# EAGLE board combined (EAGLE 5.11)
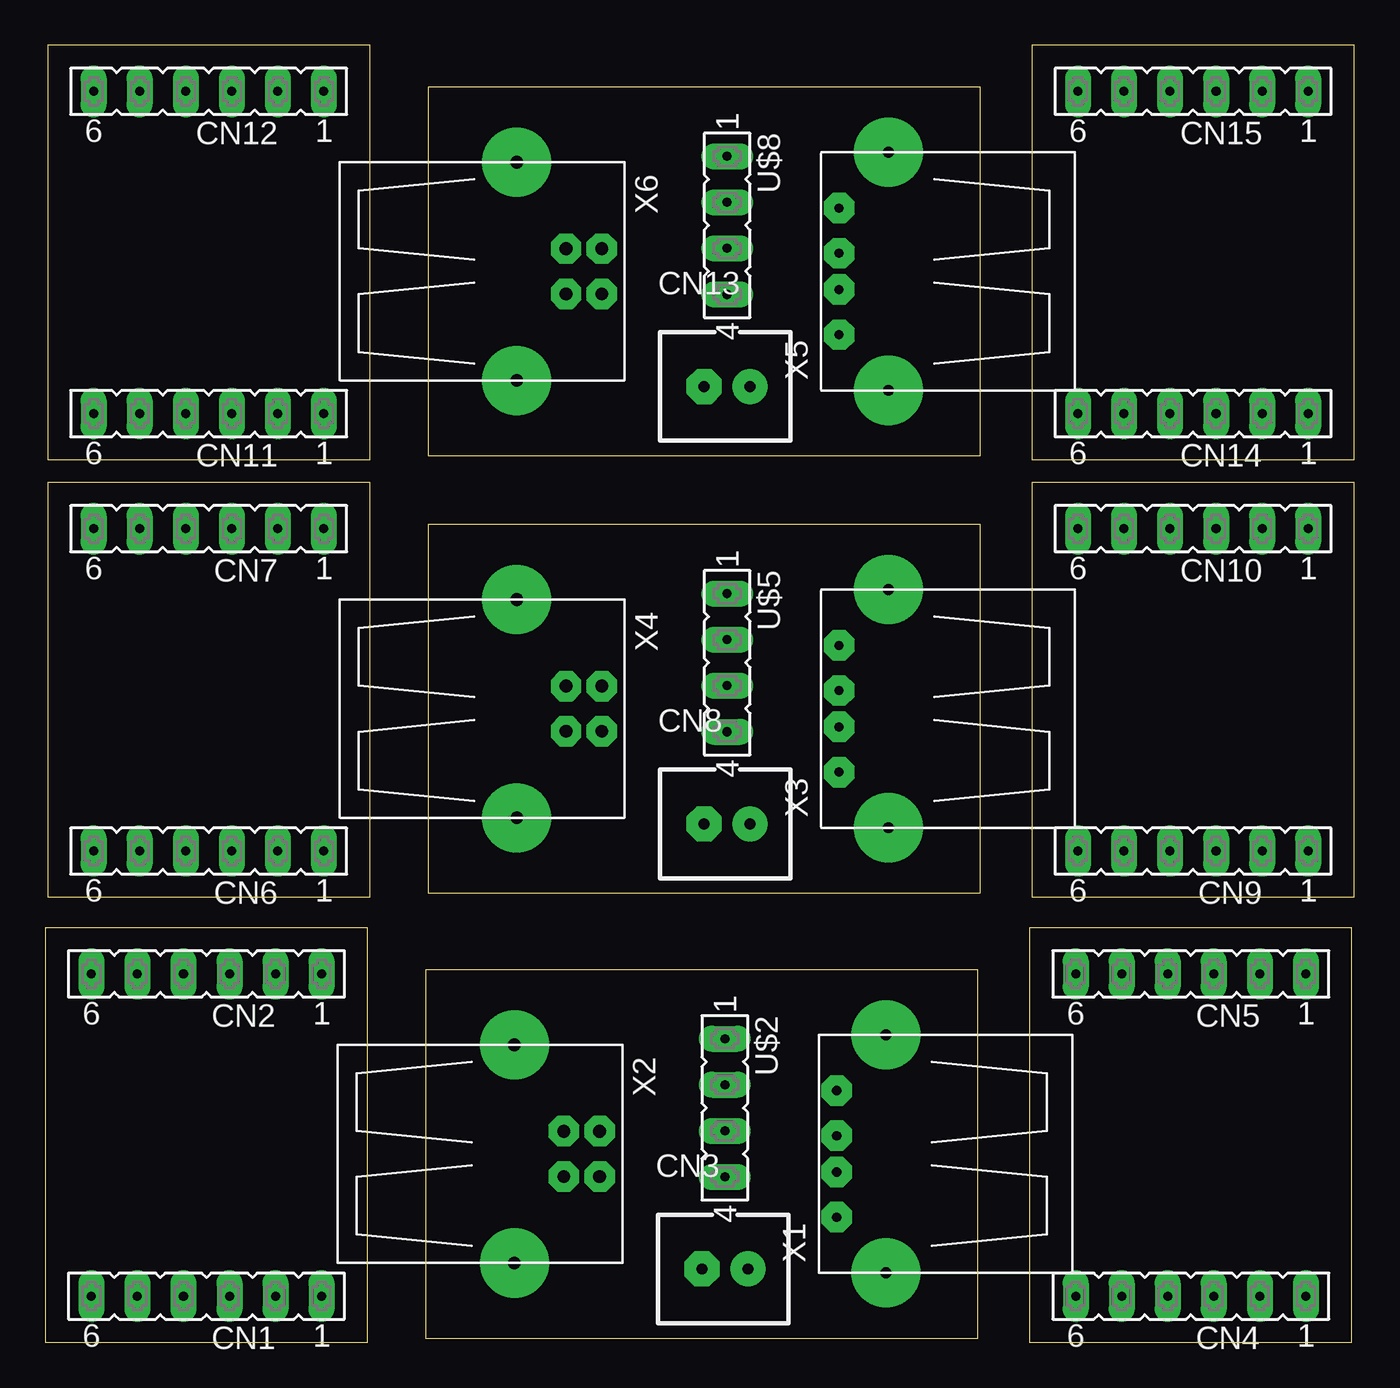
[diagram p0: board, top side]
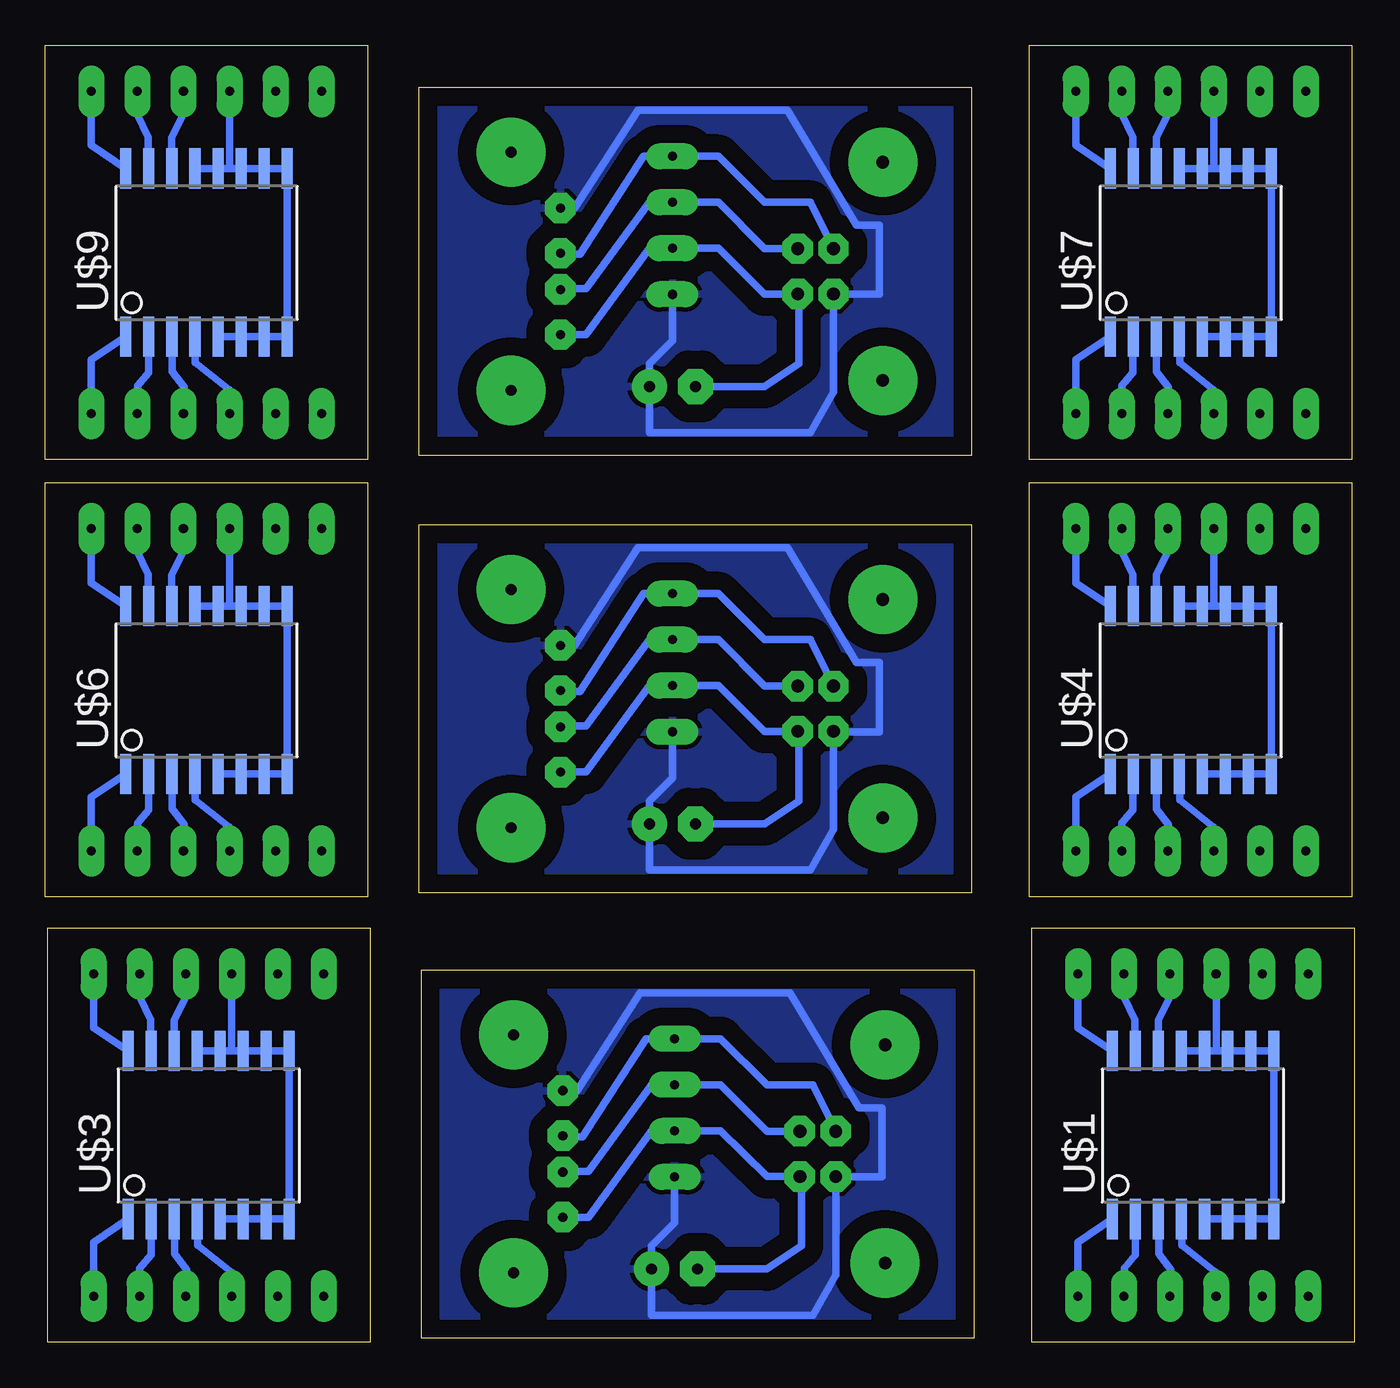
[diagram p1: board, bottom side, seen from below]

Size 72.21 x 71.55 mm. Coordinates in mm from the lower left corner, seen from the top.
Outline: 0,0 17.78,0 17.78,22.86 0,22.86 0,0
Outline: 20.98,0.23 51.46,0.23 51.46,20.55 20.98,20.55 20.98,0.23
Outline: 54.3,0 72.08,0 72.08,22.86 54.3,22.86 54.3,0
Outline: 0.13,24.56 17.91,24.56 17.91,47.42 0.13,47.42 0.13,24.56
Outline: 21.11,24.79 51.59,24.79 51.59,45.11 21.11,45.11 21.11,24.79
Outline: 54.43,24.56 72.21,24.56 72.21,47.42 54.43,47.42 54.43,24.56
Outline: 0.13,48.69 17.91,48.69 17.91,71.55 0.13,71.55 0.13,48.69
Outline: 21.11,48.92 51.59,48.92 51.59,69.24 21.11,69.24 21.11,48.92
Outline: 54.43,48.69 72.21,48.69 72.21,71.55 54.43,71.55 54.43,48.69
Copper layers (1*16): Top 0.035mm / dielectric 1.5mm / Bottom 0.035mm
Design rules "default": minimum track width 10mil, minimum drill 24mil, track to track 8mil, track to pad 8mil, pad to pad 8mil, via to via 8mil, smd to smd 8mil, copper to edge 40mil, drill to drill 8mil, minimum pad ring 10mil, minimum via ring 8mil, stop-mask expansion 4mil, vias tented up to drill 0mil, thermal gap 10mil

## Footprints (pad centres in the part's own frame; a part is rotated, then mirrored left to right if it is on the bottom)
CON-S6-1 = drill 0.5 pad 1.422 long: 1 -5.08,0; 2 -2.54,0; 3 0,0; 4 2.54,0; 5 5.08,0; 6 7.62,0
CON_HRS_DIP_2 = drill 0.6 pad 1.93 octagon: 1 -1.27,0 | drill 0.6 pad 1.93 round: 2 1.27,0
SO16L$ = smd 0.61 x 2.21: 1 -4.445,-4.636; 2 -3.175,-4.636; 3 -1.905,-4.636; 4 -0.635,-4.636; 5 0.635,-4.636; 6 1.905,-4.636; 7 3.175,-4.636; 8 4.445,-4.636; 9 4.445,4.636; 10 3.175,4.636; 11 1.905,4.636; 12 0.635,4.636; 13 -0.635,4.636; 14 -1.905,4.636; 15 -3.175,4.636; 16 -4.445,4.636
CON-S4-1 = drill 0.5 pad 1.422 long: 1 -3.81,0; 2 -1.27,0; 3 1.27,0; 4 3.81,0
USB-A-H = drill 0.5 pad 1.676 octagon: D+ 2.718,-1.003; D- 2.718,1.003; GND 2.718,-3.493; VBUS 2.718,3.493 | drill 0.6 pad 3.81 round: P$5 0,-6.566; P$6 0,6.566
USB-B-H = drill 0.7 pad 1.676 octagon: D+ 0,1.25; D- 1.981,1.25; GND 0,-1.25; VBUS 1.981,-1.25 | drill 0.7 pad 3.81 round: P$1 -2.718,-6.02; P$2 -2.718,6.02

## Placement (x,y rotation side)
CN1  CON-S6-1  [CON-S6-1]  10.16,2.54 180 top
CN2  CON-S6-1  [CON-S6-1]  10.16,20.32 180 top
CN3  [CON_HRS_DIP_2]  37.49,4.04 0 top
CN4  CON-S6-1  [CON-S6-1]  64.47,2.54 180 top
CN5  CON-S6-1  [CON-S6-1]  64.47,20.32 180 top
CN6  CON-S6-1  [CON-S6-1]  10.29,27.1 180 top
CN7  CON-S6-1  [CON-S6-1]  10.29,44.88 180 top
CN8  [CON_HRS_DIP_2]  37.62,28.6 0 top
CN9  CON-S6-1  [CON-S6-1]  64.59,27.1 180 top
CN10  CON-S6-1  [CON-S6-1]  64.59,44.88 180 top
CN11  CON-S6-1  [CON-S6-1]  10.29,51.23 180 top
CN12  CON-S6-1  [CON-S6-1]  10.29,69.01 180 top
CN13  [CON_HRS_DIP_2]  37.62,52.73 0 top
CN14  CON-S6-1  [CON-S6-1]  64.59,51.23 180 top
CN15  CON-S6-1  [CON-S6-1]  64.59,69.01 180 top
U$1  MAX-DS3231S  [SO16L$]  8.89,11.43 0 bottom
U$2  CON-S4-1  [CON-S4-1]  37.49,12.93 270 top
U$3  MAX-DS3231S  [SO16L$]  63.2,11.43 0 bottom
U$4  MAX-DS3231S  [SO16L$]  9.02,35.99 0 bottom
U$5  CON-S4-1  [CON-S4-1]  37.62,37.49 270 top
U$6  MAX-DS3231S  [SO16L$]  63.32,35.99 0 bottom
U$7  MAX-DS3231S  [SO16L$]  9.02,60.12 0 bottom
U$8  CON-S4-1  [CON-S4-1]  37.62,61.62 270 top
U$9  MAX-DS3231S  [SO16L$]  63.32,60.12 0 bottom
X1  [USB-A-H]  46.38,10.39 180 top
X2  [USB-B-H]  28.6,10.39 0 top
X3  [USB-A-H]  46.51,34.95 180 top
X4  [USB-B-H]  28.73,34.95 0 top
X5  [USB-A-H]  46.51,59.08 180 top
X6  [USB-B-H]  28.73,59.08 0 top

## Library data of the parts
CN1-CN15 = MyLib
U$1 U$3 U$4 U$6 U$7 U$9 = bant2
U$2 U$5 U$8 = bant
X1-X6 = con-usb

## Nets
GND: CN2.4 U$1.5 U$1.6 U$1.7 U$1.8 U$1.9 U$1.10 U$1.11 U$1.12 U$1.13
GND1: CN3.2 U$2.4 X1.GND X2.GND
GND2: CN5.4 U$3.5 U$3.6 U$3.7 U$3.8 U$3.9 U$3.10 U$3.11 U$3.12 U$3.13
GND3: CN7.4 U$4.5 U$4.6 U$4.7 U$4.8 U$4.9 U$4.10 U$4.11 U$4.12 U$4.13
GND4: CN8.2 U$5.4 X3.GND X4.GND
GND5: CN10.4 U$6.5 U$6.6 U$6.7 U$6.8 U$6.9 U$6.10 U$6.11 U$6.12 U$6.13
GND6: CN12.4 U$7.5 U$7.6 U$7.7 U$7.8 U$7.9 U$7.10 U$7.11 U$7.12 U$7.13
GND7: CN13.2 U$8.4 X5.GND X6.GND
GND8: CN15.4 U$9.5 U$9.6 U$9.7 U$9.8 U$9.9 U$9.10 U$9.11 U$9.12 U$9.13
N$1: CN1.1 U$1.1
N$2: CN1.2 U$1.2
N$3: CN1.3 U$1.3
N$4: CN1.4 U$1.4
N$5: U$2.1 X1.D+ X2.D+
N$6: U$2.2 X1.D- X2.D-
N$7: CN2.1 U$1.16
N$8: CN2.2 U$1.15
N$9: CN2.3 U$1.14
N$10: CN4.1 U$3.1
N$11: CN4.2 U$3.2
N$12: CN4.3 U$3.3
N$13: CN4.4 U$3.4
N$14: CN5.1 U$3.16
N$15: CN5.2 U$3.15
N$16: CN5.3 U$3.14
N$17: CN6.1 U$4.1
N$18: CN6.2 U$4.2
N$19: CN6.3 U$4.3
N$20: CN6.4 U$4.4
N$21: CN7.1 U$4.16
N$22: CN7.2 U$4.15
N$23: CN7.3 U$4.14
N$24: U$5.1 X3.D+ X4.D+
N$25: U$5.2 X3.D- X4.D-
N$26: CN9.1 U$6.1
N$27: CN9.2 U$6.2
N$28: CN9.3 U$6.3
N$29: CN9.4 U$6.4
N$30: CN10.1 U$6.16
N$31: CN10.2 U$6.15
N$32: CN10.3 U$6.14
N$33: CN11.1 U$7.1
N$34: CN11.2 U$7.2
N$35: CN11.3 U$7.3
N$36: CN11.4 U$7.4
N$37: CN12.1 U$7.16
N$38: CN12.2 U$7.15
N$39: CN12.3 U$7.14
N$40: U$8.1 X5.D+ X6.D+
N$41: U$8.2 X5.D- X6.D-
N$42: CN14.1 U$9.1
N$43: CN14.2 U$9.2
N$44: CN14.3 U$9.3
N$45: CN14.4 U$9.4
N$46: CN15.1 U$9.16
N$47: CN15.2 U$9.15
N$48: CN15.3 U$9.14
VCC: CN3.1 U$2.3 X1.VBUS X2.VBUS
VCC1: CN8.1 U$5.3 X3.VBUS X4.VBUS
VCC2: CN13.1 U$8.3 X5.VBUS X6.VBUS

## Tracks (layer width: path | path; a pad name or v marks a point on that pad's centre or on a via)
GND
  Bottom 0.406: U$1.13 U$1.12 7.62,16.07 | 7.62,16.07 U$1.11 U$1.10 U$1.9 U$1.8 U$1.7 U$1.6 U$1.5 | 7.62,16.07 CN2.4
GND1
  Bottom 0.406: U$2.4 37.49,6.58 38.76,5.31 CN3.2 38.76,1.5 29.87,1.5 28.6,3.72 X2.GND 28.6,9.12 26.06,9.12 26.06,12.93 27.33,12.93 31.14,19.28 39.4,19.28 42.89,13.88 X1.GND
  pour Bottom (isolate 1.016): 20.98,20.55 20.98,0.23 51.46,0.23 51.46,20.55
GND2
  Bottom 0.406: U$3.13 U$3.12 61.92,16.07 | 61.92,16.07 U$3.11 U$3.10 U$3.9 U$3.8 U$3.7 U$3.6 U$3.5 | 61.92,16.07 CN5.4
GND3
  Bottom 0.406: U$4.13 U$4.12 7.75,40.63 | 7.75,40.63 U$4.11 U$4.10 U$4.9 U$4.8 U$4.7 U$4.6 U$4.5 | 7.75,40.63 CN7.4
GND4
  Bottom 0.406: U$5.4 37.62,31.14 38.89,29.87 CN8.2 38.89,26.06 30,26.06 28.73,28.28 X4.GND 28.73,33.68 26.19,33.68 26.19,37.49 27.46,37.49 31.27,43.84 39.52,43.84 43.02,38.44 X3.GND
  pour Bottom (isolate 1.016): 21.11,45.11 21.11,24.79 51.59,24.79 51.59,45.11
GND5
  Bottom 0.406: U$6.13 U$6.12 62.05,40.63 | 62.05,40.63 U$6.11 U$6.10 U$6.9 U$6.8 U$6.7 U$6.6 U$6.5 | 62.05,40.63 CN10.4
GND6
  Bottom 0.406: U$7.13 U$7.12 7.75,64.76 | 7.75,64.76 U$7.11 U$7.10 U$7.9 U$7.8 U$7.7 U$7.6 U$7.5 | 7.75,64.76 CN12.4
GND7
  Bottom 0.406: U$8.4 37.62,55.27 38.89,54 CN13.2 38.89,50.19 30,50.19 28.73,52.41 X6.GND 28.73,57.81 26.19,57.81 26.19,61.62 27.46,61.62 31.27,67.97 39.52,67.97 43.02,62.57 X5.GND
  pour Bottom (isolate 1.016): 21.11,69.24 21.11,48.92 51.59,48.92 51.59,69.24
GND8
  Bottom 0.406: U$9.13 U$9.12 62.05,64.76 | 62.05,64.76 U$9.11 U$9.10 U$9.9 U$9.8 U$9.7 U$9.6 U$9.5 | 62.05,64.76 CN15.4
N$1
  Bottom 0.406: U$1.1 15.24,5.52 CN1.1
N$2
  Bottom 0.406: U$1.2 12.08,4.81 12.69,4.08 CN1.2
N$3
  Bottom 0.406: U$1.3 10.78,4.87 10.12,4.01 CN1.3
N$4
  Bottom 0.406: U$1.4 9.5,5.35 7.63,3.85 CN1.4
N$5
  Bottom 0.406: X1.D+ 43.34,11.34 42.57,11.34 39.08,16.74 U$2.1 34.95,16.74 32.41,14.2 29.87,14.2 X2.D+
N$6
  Bottom 0.406: X2.D- 32.41,11.64 34.95,14.2 U$2.2 38.76,14.2 42.25,9.44 43.66,9.44 X1.D-
N$7
  Bottom 0.406: U$1.16 15.24,17.34 CN2.1
N$8
  Bottom 0.406: U$1.15 12.09,17.79 12.7,19.05 CN2.2
N$9
  Bottom 0.406: U$1.14 10.79,17.77 10.16,19.05 CN2.3
N$10
  Bottom 0.406: U$3.1 69.55,5.52 CN4.1
N$11
  Bottom 0.406: U$3.2 66.38,4.81 66.99,4.08 CN4.2
N$12
  Bottom 0.406: U$3.3 65.09,4.87 64.42,4.01 CN4.3
N$13
  Bottom 0.406: U$3.4 63.8,5.35 61.94,3.85 CN4.4
N$14
  Bottom 0.406: U$3.16 69.55,17.34 CN5.1
N$15
  Bottom 0.406: U$3.15 66.4,17.79 67,19.05 CN5.2
N$16
  Bottom 0.406: U$3.14 65.1,17.77 64.47,19.05 CN5.3
N$17
  Bottom 0.406: U$4.1 15.37,30.09 CN6.1
N$18
  Bottom 0.406: U$4.2 12.21,29.38 12.81,28.64 CN6.2
N$19
  Bottom 0.406: U$4.3 10.91,29.43 10.24,28.57 CN6.3
N$20
  Bottom 0.406: U$4.4 9.63,29.91 7.76,28.42 CN6.4
N$21
  Bottom 0.406: U$4.16 15.37,41.9 CN7.1
N$22
  Bottom 0.406: U$4.15 12.22,42.35 12.83,43.61 CN7.2
N$23
  Bottom 0.406: U$4.14 10.92,42.33 10.29,43.61 CN7.3
N$24
  Bottom 0.406: X3.D+ 43.47,35.9 42.7,35.9 39.2,41.3 U$5.1 35.08,41.3 32.54,38.76 30,38.76 X4.D+
N$25
  Bottom 0.406: X4.D- 32.54,36.2 35.08,38.76 U$5.2 38.89,38.76 42.38,34 43.79,34 X3.D-
N$26
  Bottom 0.406: U$6.1 69.67,30.09 CN9.1
N$27
  Bottom 0.406: U$6.2 66.51,29.38 67.12,28.64 CN9.2
N$28
  Bottom 0.406: U$6.3 65.22,29.43 64.55,28.57 CN9.3
N$29
  Bottom 0.406: U$6.4 63.93,29.91 62.06,28.42 CN9.4
N$30
  Bottom 0.406: U$6.16 69.67,41.9 CN10.1
N$31
  Bottom 0.406: U$6.15 66.52,42.35 67.13,43.61 CN10.2
N$32
  Bottom 0.406: U$6.14 65.23,42.33 64.59,43.61 CN10.3
N$33
  Bottom 0.406: U$7.1 15.37,54.22 CN11.1
N$34
  Bottom 0.406: U$7.2 12.21,53.51 12.81,52.77 CN11.2
N$35
  Bottom 0.406: U$7.3 10.91,53.56 10.24,52.7 CN11.3
N$36
  Bottom 0.406: U$7.4 9.63,54.05 7.76,52.55 CN11.4
N$37
  Bottom 0.406: U$7.16 15.37,66.03 CN12.1
N$38
  Bottom 0.406: U$7.15 12.22,66.48 12.83,67.74 CN12.2
N$39
  Bottom 0.406: U$7.14 10.92,66.46 10.29,67.74 CN12.3
N$40
  Bottom 0.406: X5.D+ 43.47,60.03 42.7,60.03 39.2,65.43 U$8.1 35.08,65.43 32.54,62.89 30,62.89 X6.D+
N$41
  Bottom 0.406: X6.D- 32.54,60.33 35.08,62.89 U$8.2 38.89,62.89 42.38,58.13 43.79,58.13 X5.D-
N$42
  Bottom 0.406: U$9.1 69.67,54.22 CN14.1
N$43
  Bottom 0.406: U$9.2 66.51,53.51 67.12,52.77 CN14.2
N$44
  Bottom 0.406: U$9.3 65.22,53.56 64.55,52.7 CN14.3
N$45
  Bottom 0.406: U$9.4 63.93,54.05 62.06,52.55 CN14.4
N$46
  Bottom 0.406: U$9.16 69.67,66.03 CN15.1
N$47
  Bottom 0.406: U$9.15 66.52,66.48 67.13,67.74 CN15.2
N$48
  Bottom 0.406: U$9.14 65.23,66.46 64.59,67.74 CN15.3
VCC
  Bottom 0.406: CN3.1 32.41,4.04 30.5,5.31 30.5,9.14 X2.VBUS 32.41,9.14 34.95,11.66 U$2.3 38.76,11.66 42.25,6.9 X1.VBUS
VCC1
  Bottom 0.406: CN8.1 32.54,28.6 30.63,29.87 30.63,33.7 X4.VBUS 32.54,33.7 35.08,36.22 U$5.3 38.89,36.22 42.38,31.46 X3.VBUS
VCC2
  Bottom 0.406: CN13.1 32.54,52.73 30.63,54 30.63,57.83 X6.VBUS 32.54,57.83 35.08,60.35 U$8.3 38.89,60.35 42.38,55.59 X5.VBUS